# Altium PCB PCB2.PcbDoc
Units mm, origin at the board's own origin, x right, y up, seen from the top; angles counter-clockwise.
Board outline 75.06 x 72.01 mm, 2 copper layers (Top Layer, Bottom Layer); 35 components, 31 nets, 148 pads, 16 vias.
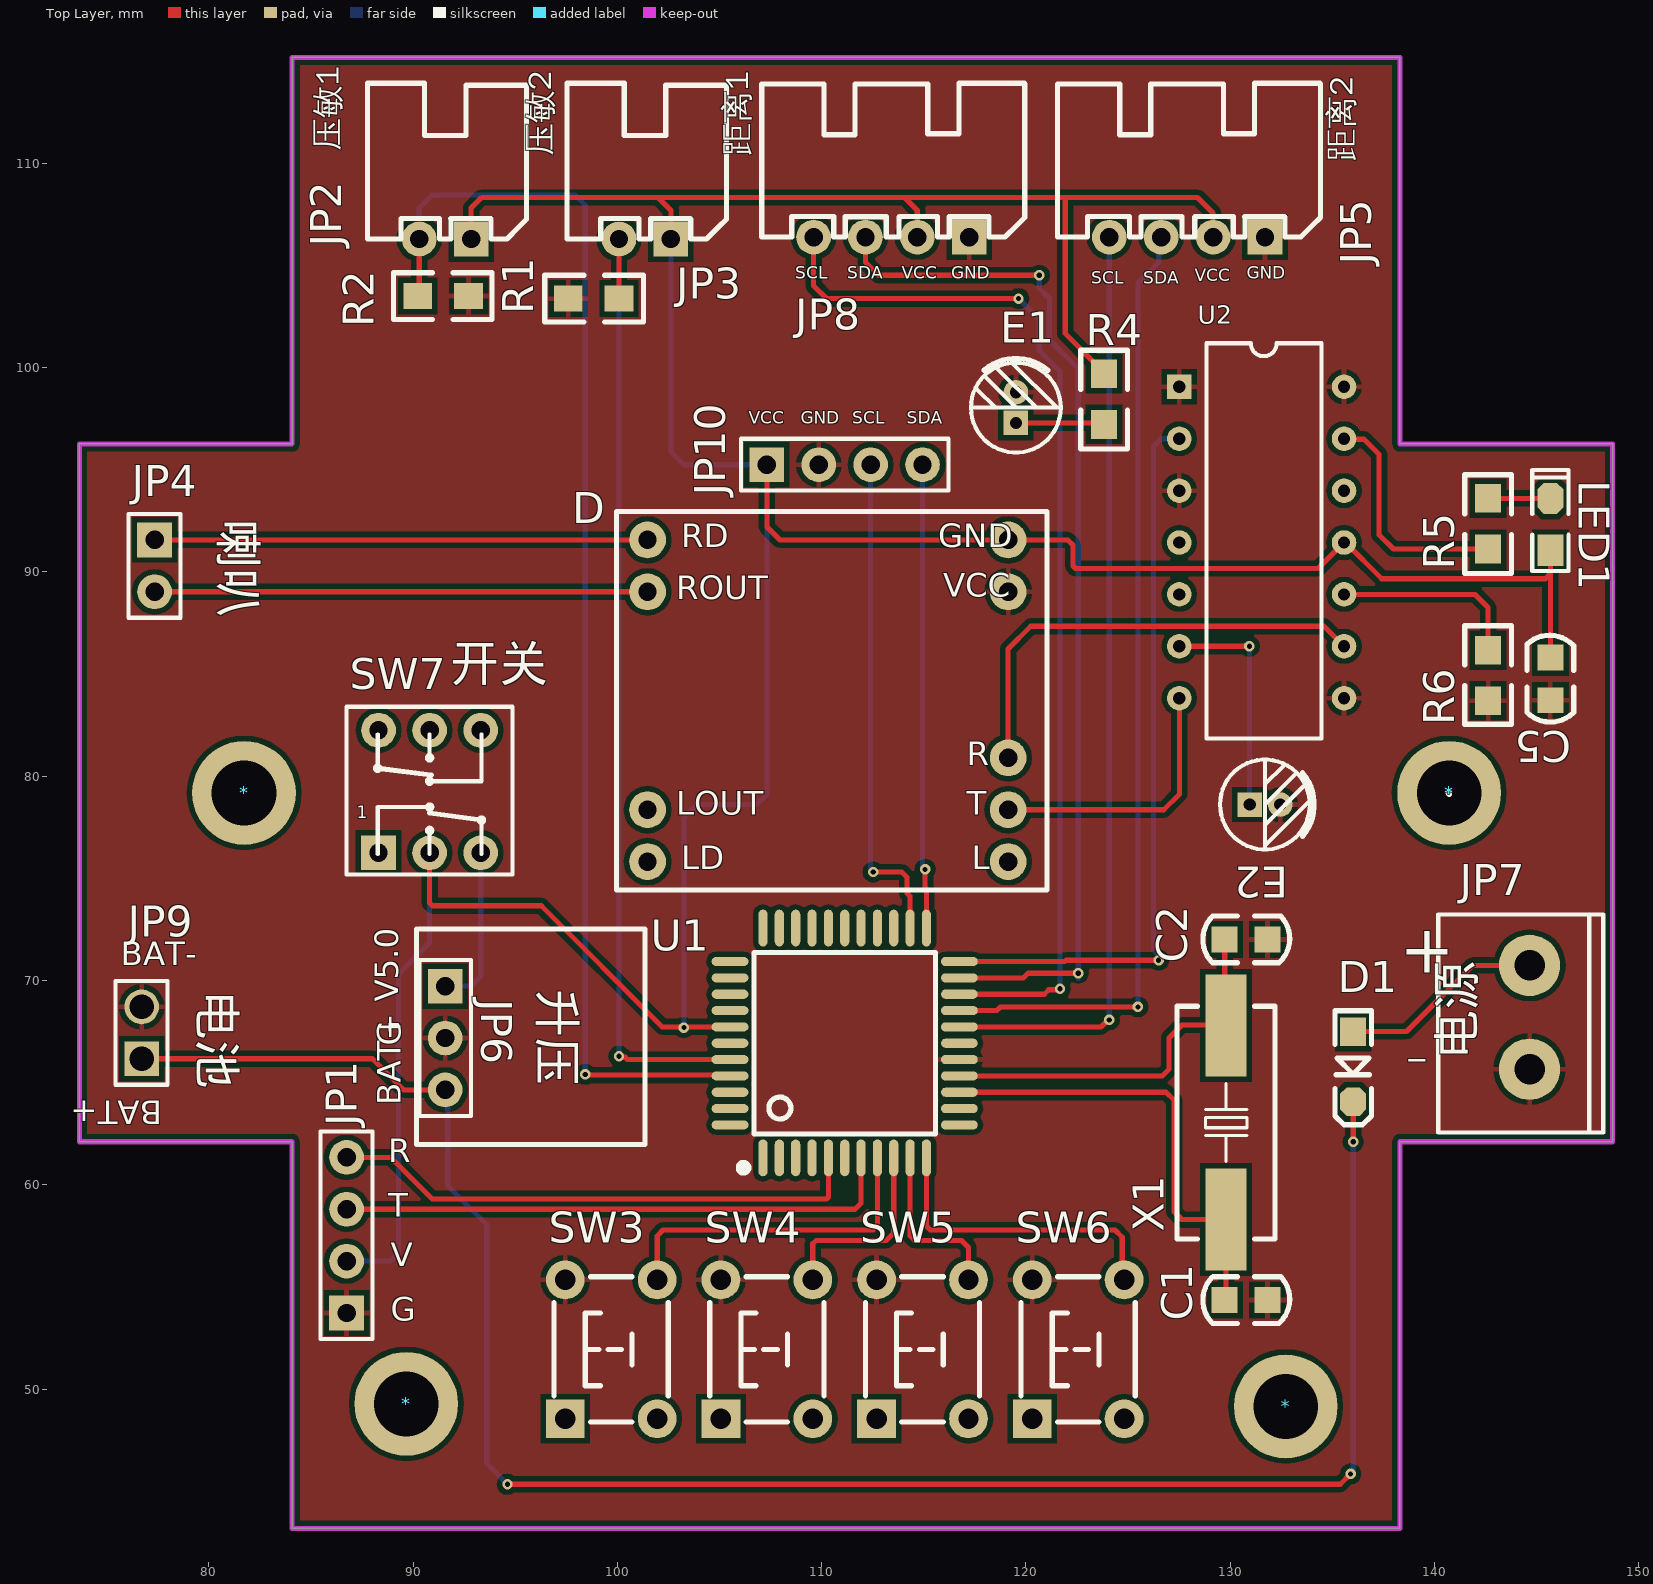
[diagram p0: Top Layer view]
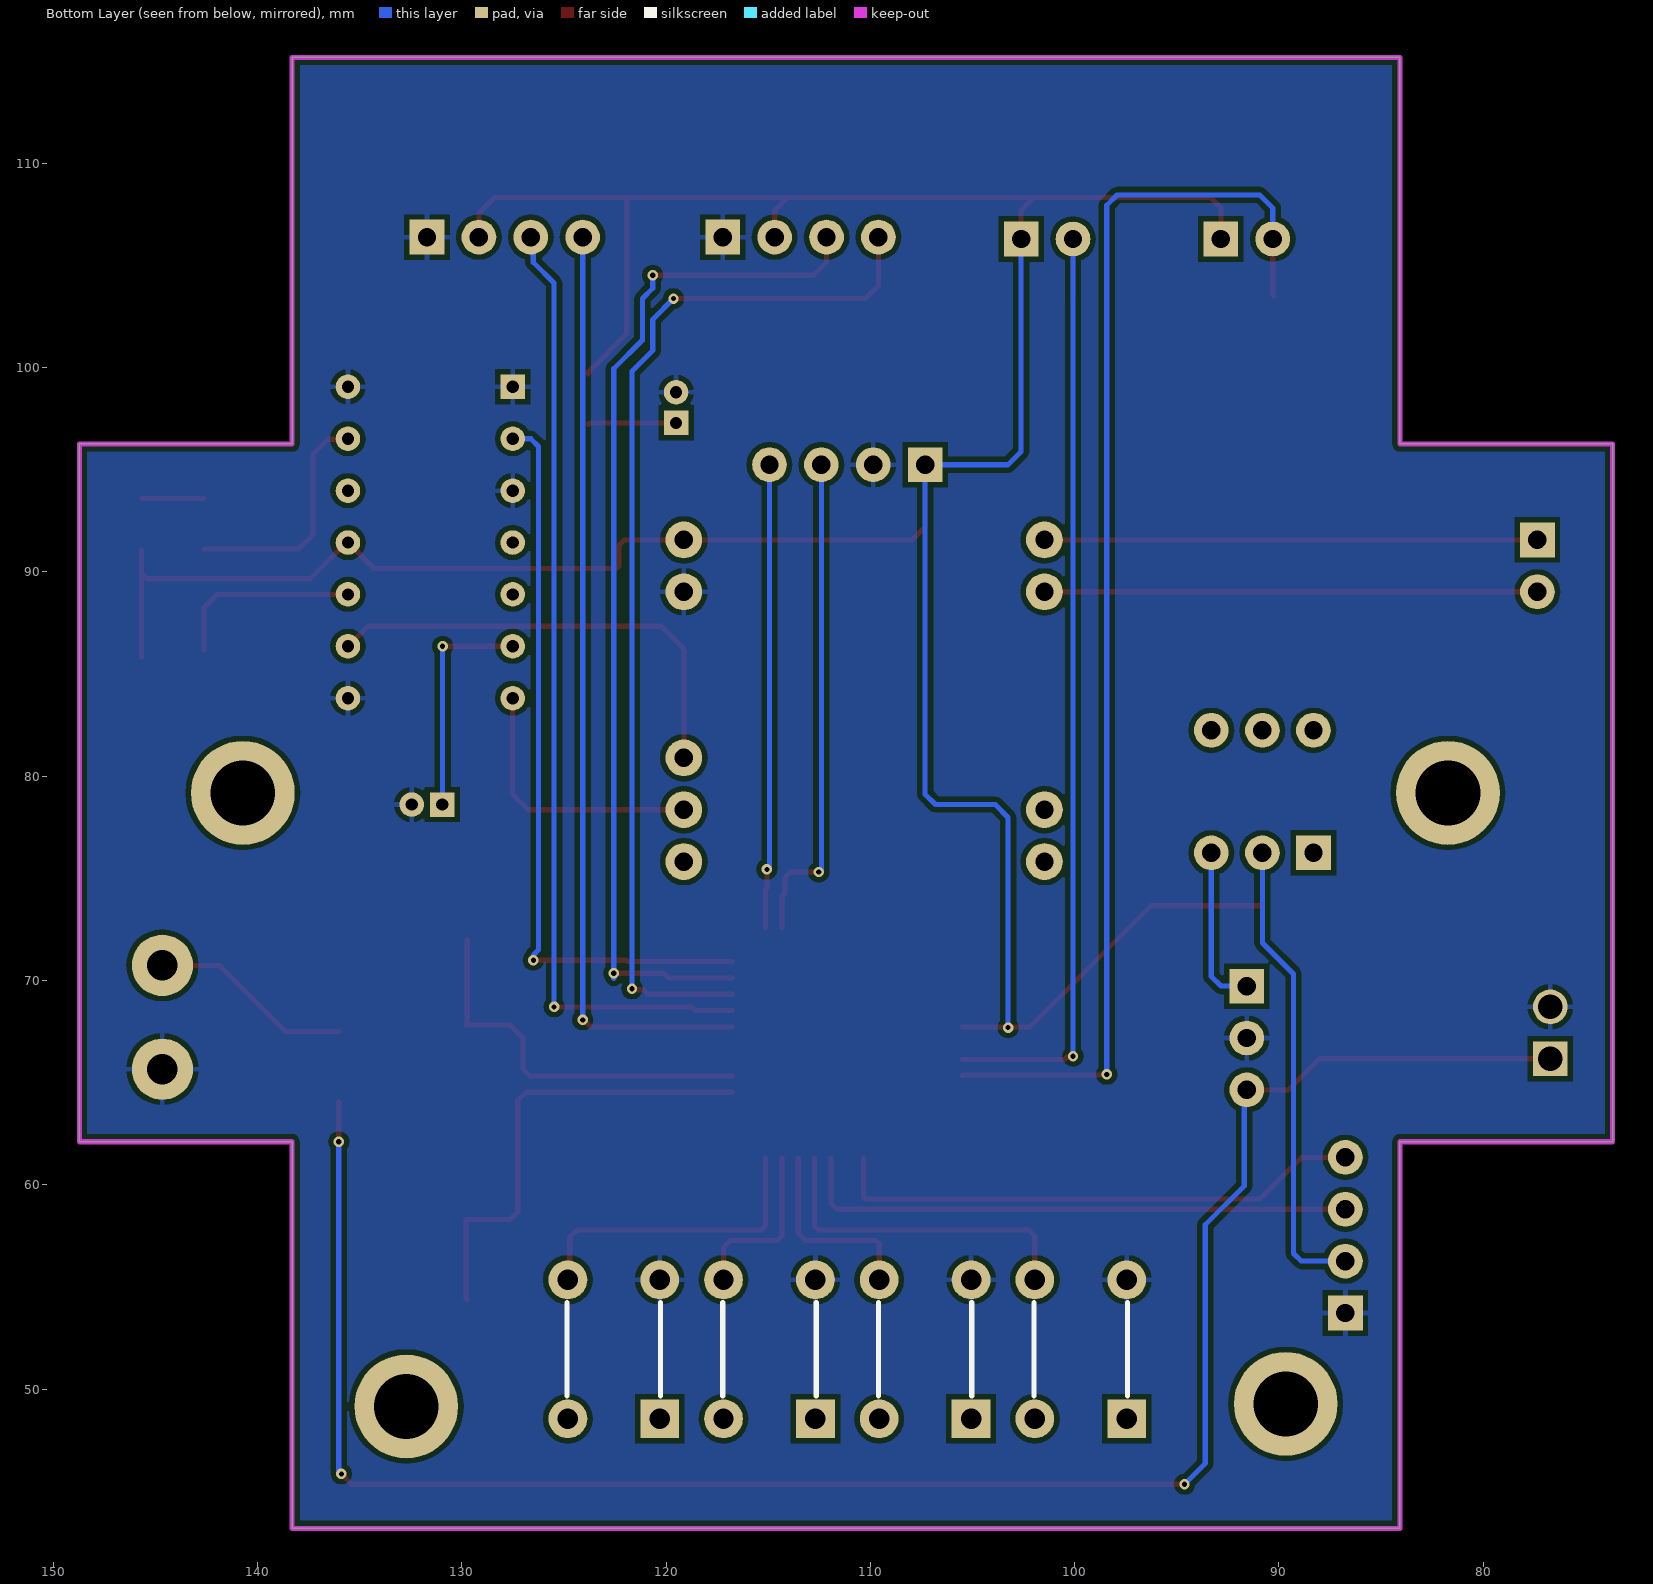
[diagram p1: Bottom Layer view, seen from below]

## Layer stack, top to bottom
Top Layer: signal copper 0.0356
Dielectric: dielectric 0.32, FR-4, Dk 4.8
Bottom Layer: signal copper 0.0356

## Board outline
84.074,43.18 84.074,62.103 73.66,62.103 73.66,96.266 84.074,96.266 84.074,115.189 138.303,115.189 138.303,96.266 148.717,96.266 148.717,62.103 138.303,62.103 138.303,43.18

## Design rules (kind name [scope] priority, off if disabled: settings)
Clearance [All] p1: gap=0.254
PolygonConnect [All] p1: connectstyle=Relief reliefconductorwidth=0.254 reliefentries=4 polygonreliefangle="90 Angle"
RoutingVias [All] p1: holewidth=0.711 width=1.27 viastyle="Through Hole" minholewidth=0.711 minwidth=1.27 maxholewidth=0.711 maxwidth=1.27
SilkscreenOverComponentPads SilkToSolderMaskClearance [IsPad] p1: minsilkscreentomaskgap=0.254
SolderMaskExpansion [All] p1: expansion=0.102
TestPointUsage FabricationTestPointUsage [All] p1: valid=0 allowmultiple=FALSE
Testpoint FabricationTestpoint [All] p1: side=3 testpointundercomponent=TRUE minsize=1.016 maxsize=2.54 preferedsize=1.524 minholesize=0 maxholesize=1.016 preferedholesize=0.813 testpointgrid=0.025 style=297 order=0123456789
Width [All] p1: maxlimit=0.254 minlimit=0.254 preferedwidth=0.254
23 further rules are at their usual default settings.

## Classes and differential pairs
component class Sheet1: * C1 C2 C5 D D1 E1 E2 JP1 JP2 JP3 JP4 JP5 JP6 JP7 JP8 JP9 JP10 LED1 R1 R2 R4 R5 R6 SW3 SW4 SW5 SW6 SW7 U1 U2 X1

## Components (designator, comment, footprint, x,y, rotation, side; value= is the part's Value field where it differs from the comment)
* "M3" "M3 125X200" 132.715,49.149 r0 top
* "M3" "M3 125X200" 81.724,79.184 r0 top
* "M3" "M3 125X200" 140.716,79.184 r0 top
* "M3" "M3 125X200" 89.662,49.276 r0 top
C1 "30" C0805 129.573,54.359 r0 top
C2 "30" C0805 129.573,72.012 r0 top
C5 "104" C0805 145.669,83.566 r90 top
D "功放模块" 功放模块 99.06,114.681 r0 top
D1 "1N4007" SOD-123 136.017,65.786 r270 top
E1 "220uF" "CAP 1.5*4*8" 119.507,98.044 r90 top
E2 "4.7uF" "CAP 1.5*4*8" 131.699,78.613 r0 top
JP1 "下载" HDR2.54-LI-4P 86.741,57.531 r90 top
JP2 "压敏1" XH2.54-WI-2P 91.567,106.299 r180 top
JP3 "压敏2" XH2.54-WI-2P 101.346,106.299 r180 top
JP4 "喇叭" HDR2.54-LI-2P#1 77.343,90.297 r270 top
JP5 "距离1" XH2.54-WI-4P 127.889,106.391 r180 top
JP6 "DC-DC" HDR2.54-LI-3P 91.567,67.183 r270 top
JP7 "电源接口" KF301-2P-BLUE 144.653,70.739 r270 top
JP8 "距离2" XH2.54-WI-4P 113.411,106.391 r180 top
JP9 "电池" HDR2.54-LI-2P#2 76.708,67.437 r90 top
JP10 "HDR-1X4" HDR2.54-M-LI-4P 111.125,95.25 r0 top
LED1 "红色" "LED 0805G" 145.669,92.329 r90 top
R1 "Resistor" R0805 97.599,103.379 r0 top
R2 "Resistor" R0805 92.71,103.505 r180 top
R4 "Resistor" R0805 123.825,99.695 r270 top
R5 "Resistor" R0805 142.621,93.599 r270 top
R6 "Resistor" R0805 142.621,83.693 r90 top
SW3 "6x6x5" "TSW DIP-6*6*6" 99.695,51.943 r90 top
SW4 "6x6x5" "TSW DIP-6*6*6" 107.315,51.943 r90 top
SW5 "6x6x5" "TSW DIP-6*6*6" 114.935,51.943 r90 top
SW6 "6x6x5" "TSW DIP-6*6*6" 122.555,51.943 r90 top
SW7 "KET 8X8" "KFT DIP-8X8" 90.805,79.248 r0 top
U1 "STC12C5A60S2" "TQFP44 10x10_N" 111.125,66.929 r0 top
U2 "ISD1820" DIP14 127.508,99.06 r0 top
X1 "12MHz" "OSC HC-49SMD" 129.794,63.043 r270 top

## Footprints (in the part's own frame and the unit in brackets; to place one, negate y for a bottom-side part, rotate by r counter-clockwise, add the part's x,y. Pads: shape width x height; smd on the part's side, far side on the other; paste and mask are expansions set on the pad)
C0805 [mil]
  rect 50x50 smd: 1(6,0) 2(88.7,-0.1)
  silkscreen extent -36,-45 131,45, body extent 8,-24 87,25, height 30
"CAP 1.5*4*8" [mm] "脚距1.5mm直径4mm高度8mm"
  rect 1.2x1.2 hole 0.6: 1(-0.75,0)
  round 1.2 hole 0.6: 2(0.75,0)
  silkscreen extent -2.2,-2.2 2.41,2.2, body extent -2,-2 2.02,2, height 8.04
DIP14 [mm]
  rect 1.2x1.2 hole 0.6: 1(0,0)
  round 1.2 hole 0.6: 2(0,-2.54) 3(0,-5.08) 4(0,-7.62) 5(0,-10.16) 6(0,-12.7) 7(0,-15.24) 8(8.062,-15.24) 9(8.062,-12.7) 10(8.062,-10.16) 11(8.062,-7.62) 12(8.062,-5.08) 13(8.062,-2.54) 14(8.062,0)
  silkscreen extent 1.32,-17.22 6.96,2.13, body extent 0.1,-17.12 7.98,1.93, height 4.19
HDR2.54-LI-2P#1 [mm] "排针，2脚"
  rect 1.7x1.7 hole 0.9: 1(-1.27,0)
  round 1.7 hole 0.9: 2(1.27,0)
  silkscreen extent -2.54,-1.27 2.54,1.27, body extent -2.54,-1.27 2.54,1.27, height 8.5
HDR2.54-LI-2P#2 [mm] "排针，2脚"
  rect 1.7x1.7 hole 1.2: 1(-1.27,0)
  round 1.7 hole 1.2: 2(1.27,0)
  silkscreen extent -2.54,-1.27 2.54,1.27, body extent -2.54,-1.27 2.54,1.27, height 8.5
HDR2.54-LI-3P [mm] "排针，3脚"
  rect 1.7x1.7 hole 0.9: 1(-2.54,0)
  round 1.7 hole 0.9: 2(0,0) 3(2.54,0)
  silkscreen extent -3.81,-1.27 3.81,1.27, body extent -3.81,-1.27 3.81,1.27, height 8.5
HDR2.54-LI-4P [mm] "排针，4脚"
  rect 1.7x1.7 hole 0.9: 1(-3.81,0)
  round 1.7 hole 0.9: 2(-1.27,0) 3(1.27,0) 4(3.81,0)
  silkscreen extent -5.08,-1.27 5.08,1.27, body extent -5.08,-1.27 5.08,1.27, height 8.5
HDR2.54-M-LI-4P [mm] "排母，4脚"
  rect 1.7x1.7 hole 0.9: 1(-3.81,0)
  round 1.7 hole 0.9: 2(-1.27,0) 3(1.27,0) 4(3.81,0)
  silkscreen extent -5.08,-1.27 5.08,1.27, body extent -5.08,-1.27 5.08,1.27, height 8.5
KF301-2P-BLUE [mm] "3A"
  round 3 hole 1.5: 1(0,0) 2(5.08,0)
  silkscreen extent -2.49,-4.47 8.18,3.61, body extent -2.48,-4.58 8.12,3.02, height 10
"KFT DIP-8X8" [mm] "自锁开关，规格：8*8mm"
  rect 1.7x1.7 hole 0.9: 1(-2.5,-3)
  round 1.7 hole 0.9: 2(0,-3) 3(2.5,-3) 4(2.5,3) 5(0,3) 6(-2.5,3)
  silkscreen extent -4.06,-4.06 4.06,4.15, body extent -3.95,-3.95 4.05,4.05, height 13.1
"LED 0805G" [mil] "绿色0805LED"
  rect 60x50 smd: 1(-50,0)
  oct 60x50 smd: 2(50,0)
  silkscreen extent -90,-35 105,35, body extent -39,-25 39,25, height 32
"M3 125X200" [mm] "M3螺丝孔，孔125Mil，焊盘200Mil"
  round 5.08 hole 3.175: 1(0,0)
"OSC HC-49SMD" [mm]
  rect 5x2 smd: 1(-4.75,0) 2(4.75,0)
  silkscreen extent -5.7,-2.4 5.7,2.4, body extent -6.5,-2.32 6.5,2.33, height 4.63
R0805 [mm] "1/8W"
  rect 1.4x1.27 smd: 1(0,0) 2(2.477,-0.001)
  silkscreen extent -1.15,-1.14 3.67,1.14, body extent 0.04,-0.62 2.04,0.64, height 0.55
SOD-123 [mil] "2.7x1.6X1.1mm（长宽高，不包括引脚）"
  rect 55x50 smd: 1(-67.5,0)
  oct 55x50 smd: 2(67.5,0)
  silkscreen extent -108,-35 112,35, body extent -73,-31 73,31, height 48
"TQFP44 10x10_N" [mm] "44脚，体宽：10x10mm, 脚距：0.8mm"
  oval 0.45x1.8 smd: 1(-4,-5.613) 2(-3.2,-5.613) 3(-2.4,-5.613) 4(-1.6,-5.613) 5(-0.8,-5.613) 6(0,-5.613) 7(0.8,-5.613) 8(1.6,-5.613) 9(2.4,-5.613) 10(3.2,-5.613) 11(4,-5.613) 23(4,5.639) 24(3.2,5.639) 25(2.4,5.639) 26(1.6,5.639) 27(0.8,5.639) 28(0,5.639) 29(-0.8,5.639) 30(-1.6,5.639) 31(-2.4,5.639) 32(-3.2,5.639) 33(-4,5.639)
  oval 1.8x0.45 smd: 12(5.613,-4) 13(5.613,-3.2) 14(5.613,-2.4) 15(5.613,-1.6) 16(5.613,-0.8) 17(5.613,0) 18(5.613,0.8) 19(5.613,1.6) 20(5.613,2.4) 21(5.613,3.2) 22(5.613,4) 34(-5.613,4) 35(-5.613,3.2) 36(-5.613,2.4) 37(-5.613,1.6) 38(-5.613,0.8) 39(-5.613,0) 40(-5.613,-0.8) 41(-5.613,-1.6) 42(-5.613,-2.4) 43(-5.613,-3.2) 44(-5.613,-4)
  silkscreen extent -5.08,-6.22 4.44,4.44, body extent -6,-6 6,6, height 1.05
"TSW DIP-6*6*6" [mm] "6*6*6mm"
  rect 1.9x1.9 hole 1: 1(-3.4,2.25)
  round 1.9 hole 1: 2(-3.4,-2.25) 3(3.4,-2.25) 4(3.4,2.25)
  silkscreen extent -3.56,-2.79 3.56,2.79, body extent -4.11,-3 4.11,3, height 5.95
XH2.54-WI-2P [mm] "接插件，2P"
  rect 1.7x1.7 hole 0.9: 1(-1.27,0)
  round 1.7 hole 0.9: 2(1.27,0)
  silkscreen extent -3.99,-7.62 3.81,0, body extent -3.77,-7.35 3.77,0.35, height 5.73
XH2.54-WI-4P [mm] "接插件，4P"
  rect 1.7x1.7 hole 0.9: 1(-3.81,0)
  round 1.7 hole 0.9: 2(-1.27,0) 3(1.27,0) 4(3.81,0)
  silkscreen extent -6.53,-7.53 6.35,0, body extent -6.31,-7.35 6.31,0.35, height 5.73
功放模块 [mm]
  round 1.8 hole 0.9: 1(20.066,-23.114) 2(20.066,-25.654) 3(20.066,-33.782) 4(20.066,-36.322) 5(20.066,-38.862) 6(2.413,-38.862) 7(2.413,-36.322) 8(2.413,-25.654) 9(2.413,-23.114)
  silkscreen extent 0.89,-40.26 21.97,-21.72, body extent 0.51,-40.51 22.22,-21.46, height 1.27

## Part data
* * * *: "铜柱孔"
C1 C2 C5: library part C, "无极性贴片电容"
D1: "整流二极管"
E1 E2: library part C-CAP, "直插电解电容"
JP1 JP5 JP8 JP10: library part "Header 4", "4P接插件"
JP2 JP3 JP4 JP7 JP9: library part "Header 2", "2P接插件"
JP6: library part "Header 3", "3P接插件"
LED1: library part LED-SMD, "贴片LED"
SW3 SW4 SW5 SW6: library part "TSW DIP-6x6", "直插6x6轻触开关"
SW7: "8*8自锁开关"
U1: "STC单片机"
U2: "录音模块"
X1: library part XTAL-2P, "2脚无源脚晶振"

## Via types
v1: diameter 0.508, hole 0.254, Top Layer to Bottom Layer, 16 vias

## Nets (pads, with @x,y where several pads share a name; then routed paths per layer and width w, separated by ;. In a path a pad name is that pad's centre, name@x,y a point inside that pad or via, vN(x,y) a via of type N, cw(c..) or ccw(c..) an arc to the next point about the centre after c; other vN are vias at no path point)
5V: JP6.1 SW7.3 | length 8
  Top Layer w0.254: SW7.3 SW7.3@93.345,76.208
  Bottom Layer w0.254: JP6.1 92.837,69.723 93.305,70.191 SW7.3
BAT: D1.2 JP6.3 JP9.1 | length 95.8
  Top Layer w0.254: JP9.1 88.011,66.167 89.535,64.643 JP6.3 ; v1(94.615,45.339) 135.382,45.339 v1(135.89,45.847) ; v1(136.017,62.103) D1.2
  Bottom Layer w0.254: JP6.3 91.694,64.516 91.694,59.944 93.599,58.039 93.599,46.355 v1(94.615,45.339) ; v1(135.89,45.847) 135.89,45.916 136.017,46.043 v1(136.017,62.103)
GND: C1.2 C2.2 C5.1 D.2 E1.2 E2.2 JP1.1 JP5.1 JP6.2 JP7.2 JP8.1 JP9.2 JP10.2 R1.1 R2.1 R6.1 SW3.4 SW4.4 SW5.4 SW6.4 U1.16 U2.1 U2.3 U2.8 U2.14
K1: SW3.3 U1.8 | length 16.5
  Top Layer w0.254: SW3.3 101.945,57.495 102.235,57.785 112.522,57.785 112.725,57.988 U1.8
K2: SW4.3 U1.9 | length 9.6
  Top Layer w0.254: SW4.3 109.565,57.114 109.728,57.277 113.157,57.277 113.525,57.645 U1.9
K3: SW5.3 U1.10 | length 8.5
  Top Layer w0.254: U1.10 114.325,57.506 114.554,57.277 116.84,57.277 117.185,56.932 SW5.3
K4: SW6.3 U1.11 | length 15.3
  Top Layer w0.254: U1.11 115.125,57.976 115.316,57.785 124.364,57.785 124.714,57.435 124.714,55.434 SW6.3
NetC1_1: C1.1 U1.14 X1.2 | length 22.8
  Top Layer w0.254: U1.14 126.86,64.529 127.254,64.135 127.254,58.674 127.635,58.293 X1.2 129.794,54.427 C1.1
NetC2_1: C2.1 U1.15 X1.1 | length 19.2
  Top Layer w0.254: U1.15 126.67,65.329 127,65.659 127,67.183 127.635,67.818 X1.1@129.769,67.818 ; C2.1 129.725,67.862 X1.1@129.769,67.818 ; X1.1 X1.1@129.769,67.818
NetD1_1: D1.1 JP7.1 | length 10
  Top Layer w0.254: D1.1 138.62,67.501 141.859,70.739 JP7.1
NetE1_1: E1.1 R4.2 | length 4.3
  Top Layer w0.254: E1.1 123.748,97.294 R4.2
NetE2_1: E2.1 U2.6 | length 11.2
  Top Layer w0.254: U2.6 v1(130.937,86.36)
  Bottom Layer w0.254: v1(130.937,86.36) 130.937,78.625 E2.1
NetLED1_2: LED1.2 R5.1 | length 3
  Top Layer w0.254: R5.1 LED1.2
NetR5_2: R5.2 U2.13 | length 11.6
  Top Layer w0.254: U2.13 135.595,96.494 136.551,96.494 137.287,95.758 137.287,91.821 137.986,91.122 R5.2
NetR6_2: R6.2 U2.10 | length 9.4
  Top Layer w0.254: U2.10 141.986,88.9 142.622,88.264 R6.2
PLAYE: U1.22 U2.2 | length 36.5
  Top Layer w0.254: U1.22 121.889,70.929 121.953,70.993 v1(126.492,70.993)
  Bottom Layer w0.254: v1(126.492,70.993) 126.492,71.247 126.238,71.501 126.238,96.139 126.619,96.52 U2.2
R: D.3 U2.9 | length 22.6
  Top Layer w0.254: D.3 119.126,86.233 120.234,87.341 134.589,87.341 U2.9
RD: D.9 JP4.1 | length 24.1
  Top Layer w0.254: JP4.1 D.9
ROUT: D.8 JP4.2 | length 24.1
  Top Layer w0.254: JP4.2 D.8
RP1: JP3.2 R1.2 U1.40 | length 48.4
  Top Layer w0.254: v1(100.076,66.294) 100.125,66.245 100.379,66.245 100.495,66.129 U1.40 ; R1.2 JP3.2
  Bottom Layer w0.254: v1(100.076,66.294) JP3.2
RP2: JP2.2 R2.2 U1.41 | length 63
  Top Layer w0.254: R2.2 90.297,103.57 JP2.2 ; v1(98.425,65.405) 98.463,65.367 105.474,65.367 U1.41
  Bottom Layer w0.254: JP2.2@90.043,106.045 JP2.2 90.297,107.823 90.932,108.458 97.917,108.458 98.425,107.95 v1(98.425,65.405)
RXD: JP1.4 U1.5 | length 26.4
  Top Layer w0.254: JP1.4 88.9,61.341 90.932,59.309 110.236,59.309 110.325,59.398 U1.5
SCL1: JP5.4 U1.18 | length 45.8
  Top Layer w0.254: U1.18 123.667,67.729 124.01,68.072 v1(124.079,68.072)
  Bottom Layer w0.254: v1(124.079,68.072) JP5.4
SCL2: JP8.4 U1.20 | length 52.3
  Top Layer w0.254: JP8.4 109.601,104.013 110.236,103.378 v1(119.634,103.378) ; U1.20 120.891,69.329 121.109,69.547 121.617,69.547 v1(121.666,69.596)
  Bottom Layer w0.254: v1(119.634,103.378) 120.65,102.362 120.65,100.838 121.666,99.822 v1(121.666,69.596)
SCL_OLED: JP10.3 U1.24 | length 24.3
  Top Layer w0.254: v1(112.522,75.311) 113.919,75.311 114.173,75.057 114.173,74.271 114.325,74.119 U1.24
  Bottom Layer w0.254: JP10.3 112.395,75.438 v1(112.522,75.311)
SDA1: JP5.3 U1.19 | length 47
  Top Layer w0.254: U1.19 118.567,68.529 118.745,68.707 v1(125.476,68.707)
  Bottom Layer w0.254: v1(125.476,68.707) 125.476,104.14 126.496,105.16 126.496,106.268 JP5.3
SDA2: JP8.3 U1.21 | length 51.1
  Top Layer w0.254: JP8.3 112.141,105.156 112.776,104.521 v1(120.65,104.521) ; U1.21 119.862,70.129 120.091,70.358 v1(122.555,70.358)
  Bottom Layer w0.254: v1(120.65,104.521) 120.65,103.886 121.158,103.378 121.158,101.346 122.555,99.949 v1(122.555,70.358) 122.555,70.104
SDA_OLED: JP10.4 U1.23 | length 22.8
  Top Layer w0.254: v1(115.062,75.438) 115.062,74.549 115.125,74.486 U1.23
  Bottom Layer w0.254: JP10.4 114.935,75.565 v1(115.062,75.438)
T: D.4 U2.7 | length 13.4
  Top Layer w0.254: D.4 126.746,78.359 127.508,79.121 U2.7
TXD: JP1.3 U1.7 | length 27.5
  Top Layer w0.254: JP1.3 111.633,58.801 111.925,59.093 U1.7
VCC: C5.2 D.1 JP1.2 JP2.1 JP3.1 JP5.2 JP8.2 JP10.1 LED1.1 R4.1 SW7.2 U1.38 U2.11 | length 192
  Top Layer w0.254: SW7.2 90.805,73.809 90.954,73.66 96.266,73.66 102.197,67.729 U1.38 ; JP2.1 92.837,107.823 93.345,108.331 101.981,108.331 ; JP3.1 102.616,107.696 101.981,108.331 ; JP10.1 107.315,92.202 107.95,91.567 D.1 122.047,91.567 122.301,91.313 122.301,90.297 122.428,90.17 134.3,90.17 U2.11 135.636,91.44 137.414,89.662 145.415,89.662 145.669,89.916 ; JP8.2 114.681,107.696 114.046,108.331 ; D.1@119.634,91.186 D.1@119.761,91.313 ; R4.1 123.825,99.76 121.92,101.665 121.92,108.331 ; JP5.2 129.159,107.569 128.397,108.331 121.92,108.331 ; LED1.1 145.669,89.916 ; C5.2 145.669,85.822 145.669,89.916 ; 101.981,108.331 114.046,108.331 ; 114.046,108.331 121.92,108.331
  Bottom Layer w0.254: JP1.2 88.9,56.261 89.281,56.642 89.281,70.313 90.805,71.837 SW7.2 ; JP3.1 102.616,95.885 103.251,95.25 JP10.1 107.315,79.121 106.807,78.613 103.886,78.613 103.251,77.978 v1(103.251,67.691)
pads on no net: *.1 D.5 D.6 D.7 SW3.1 SW3.2 SW4.1 SW4.2 SW5.1 SW5.2 SW6.1 SW6.2 SW7.1 SW7.4 SW7.5 SW7.6 U1.1 U1.2 U1.3 U1.4 U1.6 U1.12 U1.13 U1.17 U1.25 U1.26 U1.27 U1.28 U1.29 U1.30 U1.31 U1.32 U1.33 U1.34 U1.35 U1.36 U1.37 U1.39 U1.42 U1.43 U1.44 U2.4 U2.5 U2.12

## Polygon pours and split planes (outlines as drawn)
GND on Top Layer "GND_L01_P000" (solid, pour order 0): 73.66,96.266 84.074,96.266 84.074,115.189 138.303,115.189 138.303,96.266 148.717,96.266 148.717,62.103 138.303,62.103 138.303,43.18 84.074,43.18 84.074,62.103 73.66,62.103 73.66,96.266
GND on Bottom Layer "GND_L02_P008" (solid, pour order 8): 73.66,96.266 84.074,96.266 84.074,115.189 138.303,115.189 138.303,96.266 148.717,96.266 148.717,62.103 138.303,62.103 138.303,43.18 84.074,43.18 84.074,62.103 73.66,62.103 73.66,96.266

## Keep-outs
Keep-Out Layer:
  lines w0.254: 138.303,115.062 138.303,96.266 ; 73.66,62.103 84.074,62.103 ; 73.66,62.103 73.66,96.266 ; 73.66,62.103 84.074,62.103 ; 73.66,62.103 73.66,62.103 ; 73.66,62.103 73.66,96.266 ; 73.66,96.266 84.074,96.266 ; 73.66,96.266 73.66,96.266 ; 73.66,96.266 84.074,96.266 ; 84.074,43.18 84.074,62.103 ; 84.074,43.18 138.303,43.18 ; 84.074,43.18 84.074,62.103 ; 84.074,43.18 138.303,43.18 ; 84.074,96.266 84.074,115.189 ; 84.074,96.266 84.074,115.189 ; 84.074,115.189 138.303,115.189 ; 84.074,115.189 138.303,115.189 ; 138.303,43.18 138.303,62.103 ; 138.303,43.18 138.303,62.103 ; 138.303,62.103 148.717,62.103 ; 138.303,62.103 148.717,62.103 ; 138.303,96.266 148.717,96.266 ; 138.303,96.266 138.303,96.266 ; 138.303,96.266 138.303,114.808 138.303,115.189 ; 138.303,96.266 138.303,115.189 ; 138.303,96.266 148.717,96.266 ; 138.303,115.189 138.303,115.189 ; 148.717,62.103 148.717,96.266 ; 148.717,62.103 148.717,96.266 ; 148.717,96.266 148.717,96.266

## Silkscreen, mask and mechanical layers (free items; w line width, h text height)
Top Overlay:
  lines w0.254: 90.17,61.976 90.17,72.517 ; 90.297,61.976 101.346,61.976 101.346,72.517 90.297,72.517 ; 140.716,79.121 140.653,79.184 140.716,79.248
  text "压敏1" at 86.741,110.617 h2 r90
  text "压敏2" at 97.155,110.363 h2 r90
  text "距离1" at 106.807,110.363 h2 r90
  text "距离2" at 136.398,110.109 h2 r90
  text "SCL" at 108.712,104.14 h1.03
  text "SDA" at 111.252,104.14 h1.03
  text "VCC" at 113.919,104.14 h1.03
  text "GND" at 116.332,104.14 h1.03
  text "GND" at 130.81,104.14 h1.03
  text "VCC" at 128.27,104.013 h1.03
  text "SCL" at 123.19,103.886 h1.03
  text "SDA" at 125.73,103.886 h1.03
  text "VCC" at 106.426,97.028 h1.03
  text "GND" at 108.966,97.028 h1.03
  text "SCL" at 111.506,97.028 h1.03
  text "SDA" at 114.173,97.028 h1.03
  text "喇叭" at 80.01,92.583 h3 r270
  text "开关" at 91.821,84.074 h3
  text "1" at 87.249,77.724 h1.03
  text "BAT-" at 75.692,70.358 h2
  text "升压" at 95.631,69.596 h3 r270
  text "+" at 138.303,69.596 h4
  text "电池" at 78.994,69.469 h3 r270
  text "V5.0" at 89.662,68.961 h2 r90
  text "G" at 89.789,66.802 h2 r90
  text "电源" at 142.494,66.167 h3 r90
  text "BAT+" at 77.724,64.516 h2 r180
  text "-" at 138.557,64.516 h4
  text "BAT+" at 89.789,63.881 h2 r90
  text "R" at 88.773,60.706 h2
  text "T" at 88.773,58.039 h2
  text "V" at 88.9,55.626 h2
  text "G" at 88.9,52.959 h2

## Text inside footprints (layer, text, board x,y; h text height)
D: Top Overlay "L" at 117.348,75.057 h2; Top Overlay "T" at 117.094,77.724 h2; Top Overlay "R" at 117.094,80.137 h2; Top Overlay "VCC" at 115.951,88.392 h2; Top Overlay "GND" at 115.697,90.805 h2; Top Overlay "LD" at 103.124,75.057 h2; Top Overlay "LOUT" at 102.87,77.724 h2; Top Overlay "ROUT" at 102.87,88.265 h2; Top Overlay "RD" at 103.124,90.805 h2